# Altium PCB PCB1.PcbDoc
Units mm, origin at the board's own origin, x right, y up, seen from the top; angles counter-clockwise.
Board outline 76.71 x 51.56 mm, 2 copper layers (Top Layer, Bottom Layer); 14 components, 39 nets, 74 pads, 0 vias.
Unrouted connection lines stored in the file: 31.
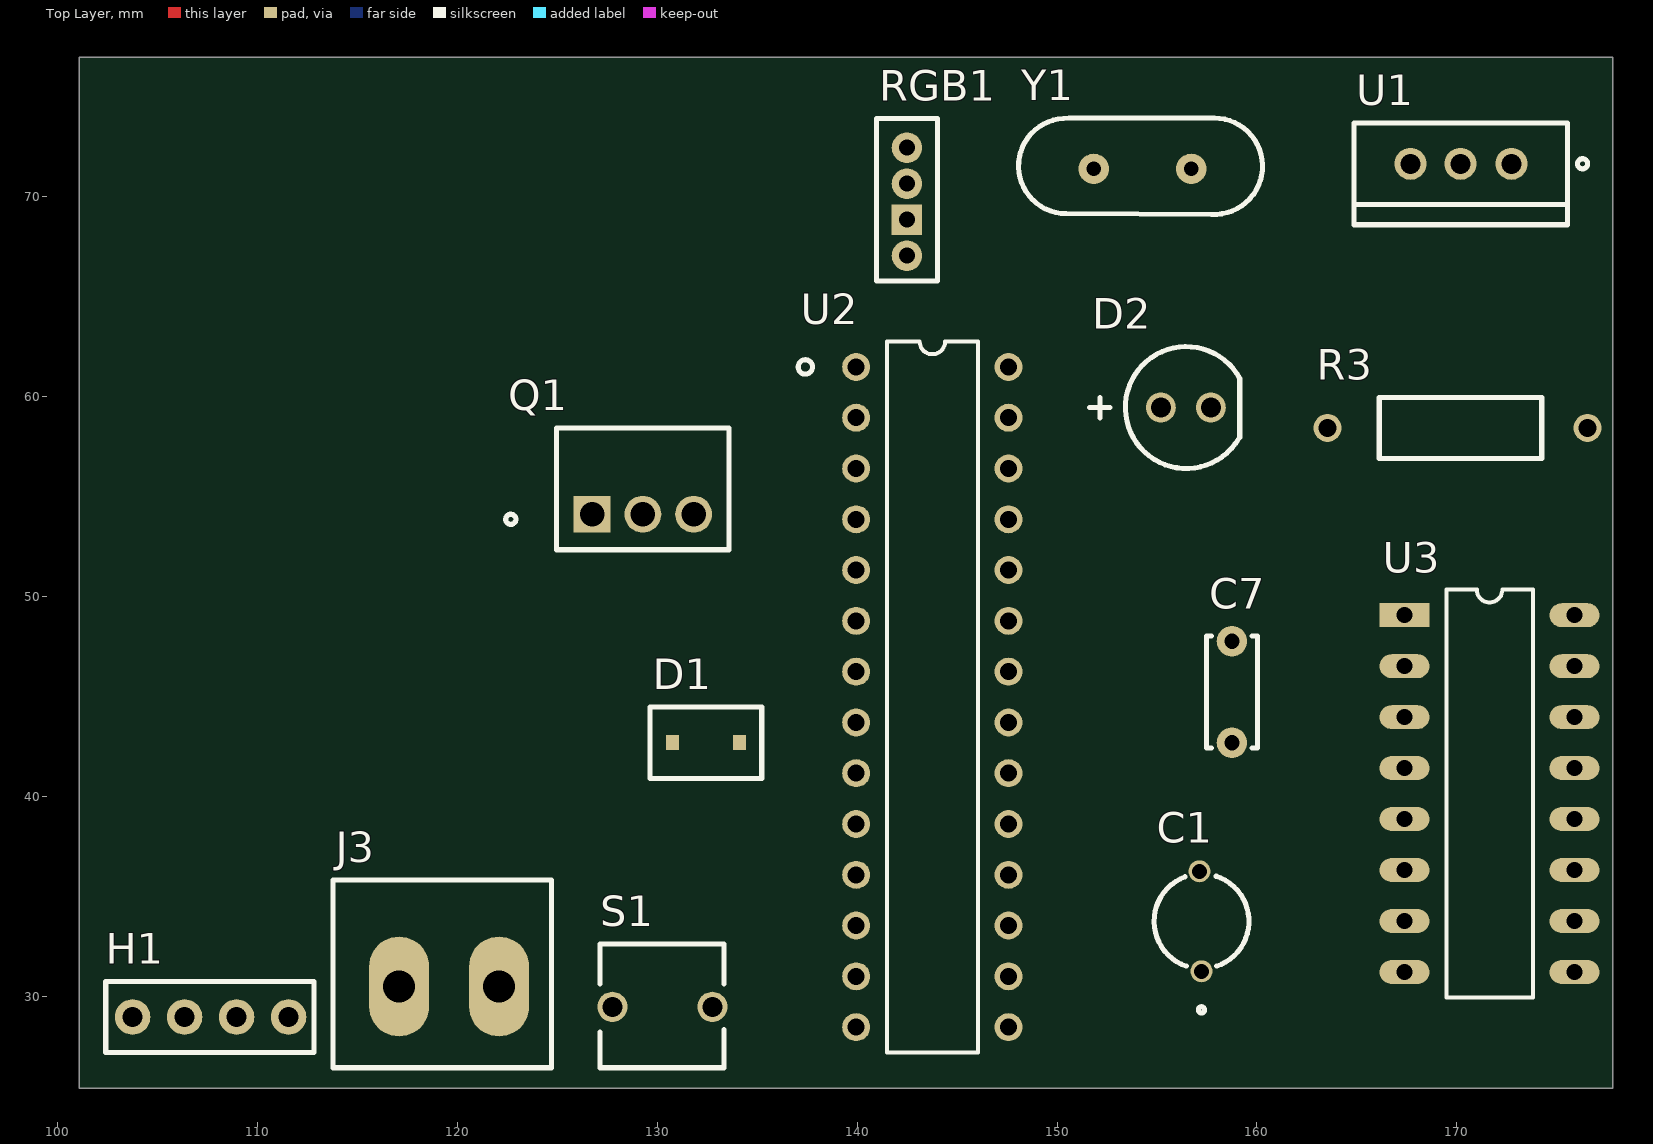
[diagram p0: Top Layer view]
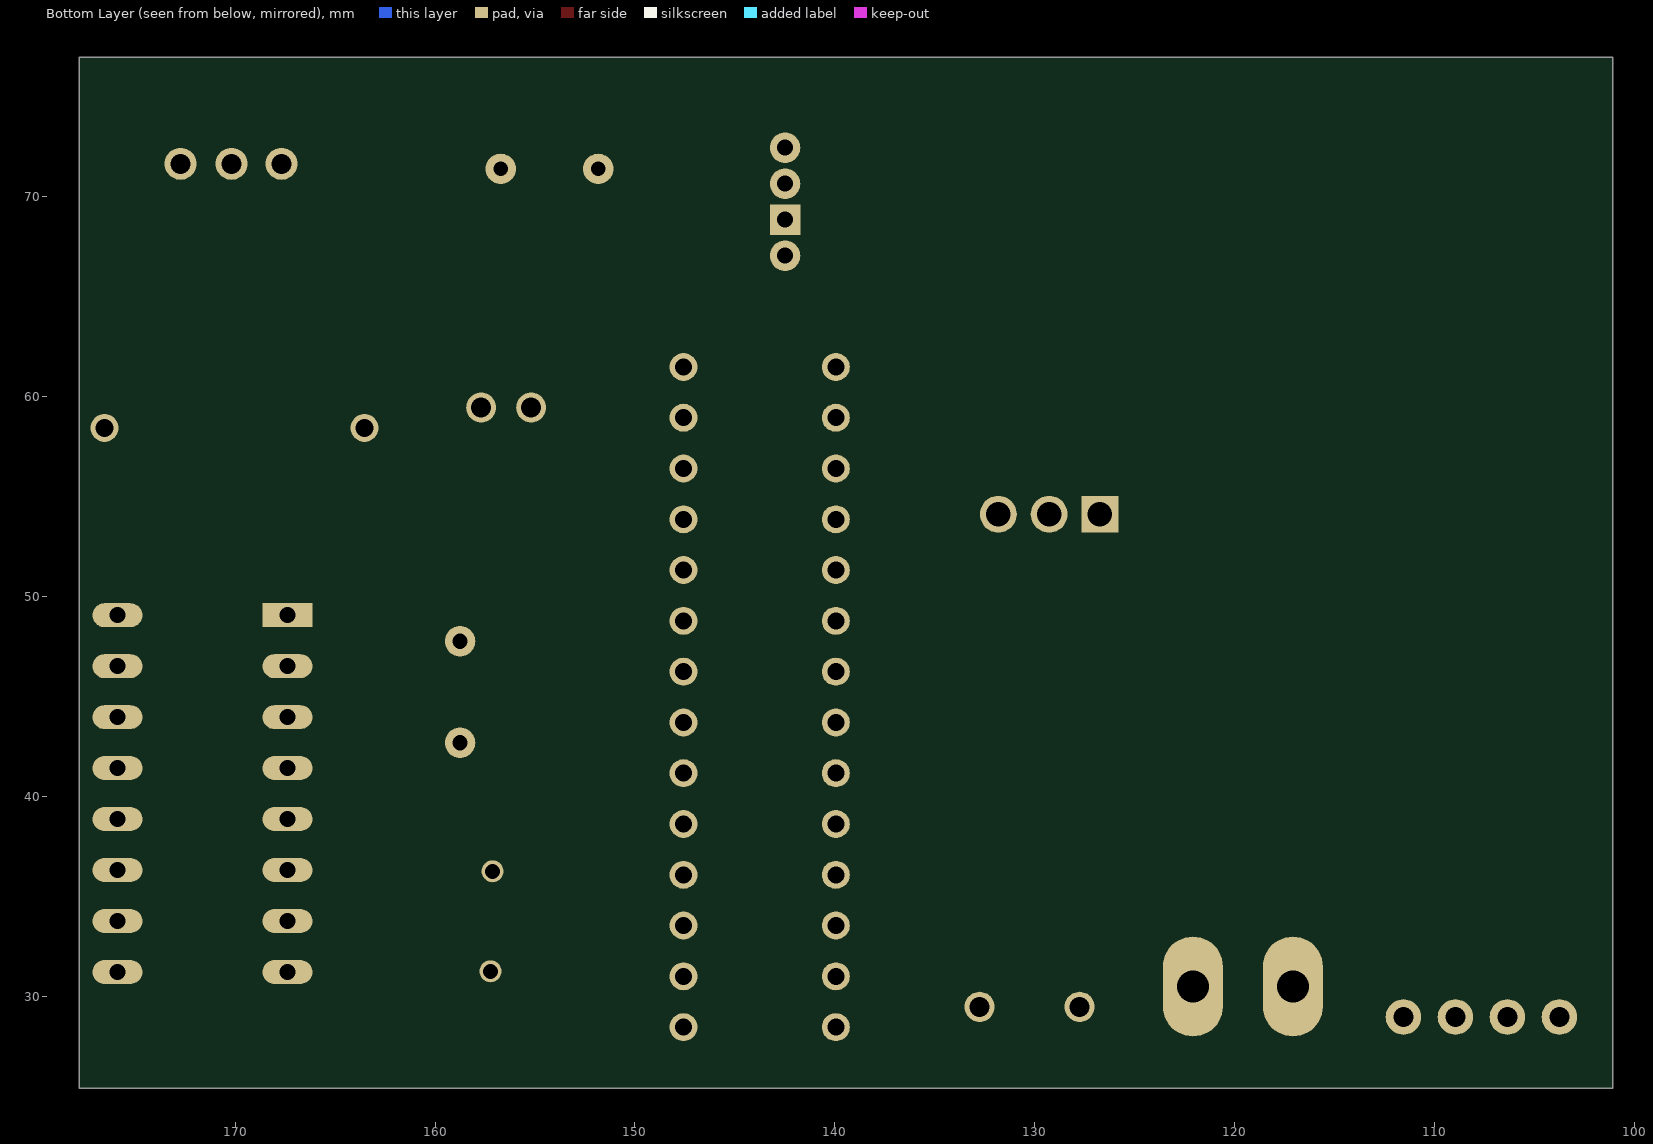
[diagram p1: Bottom Layer view, seen from below]

## Layer stack, top to bottom
Top Solder: solder mask 0.0102, Solder Resist, Dk 3.5
Top Layer: signal copper 0.0356
Dielectric 1: dielectric 0.32, FR-4, Dk 4.8
Bottom Layer: signal copper 0.0356
Bottom Solder: solder mask 0.0102, Solder Resist, Dk 3.5

## Board outline
101.092,25.4 177.8,25.4 177.8,76.962 101.092,76.962

## Design rules (kind name [scope] priority, off if disabled: settings)
Clearance [All] p1: gap=0.254 ignorepadtopadclearanceinfootprint=FALSE
PolygonConnect [All] p1: connectstyle=Relief reliefconductorwidth=0.254 reliefentries=4 polygonreliefangle="90 Angle" airgapwidth=0.254
RoutingVias [All] p1: holewidth=0.711 width=1.27 viastyle="Through Hole" minholewidth=0.711 minwidth=1.27 maxholewidth=0.711 maxwidth=1.27
SolderMaskExpansion [All] p1: expansion=0.102 istentingtop=FALSE
SupplyNets "Schematic Supply Nets_5" [InNet('+4.5V : 36V')] p1: voltage=0.000
SupplyNets "Schematic Supply Nets_4" [InNet('Vin')] p2: voltage=0.000
SupplyNets "Schematic Supply Nets_3" [InNet('+5V')] p3: voltage=0.000
SupplyNets "Schematic Supply Nets_2" [InNet('+5')] p4: voltage=0.000
SupplyNets "Schematic Supply Nets_1" [InNet('VCC')] p5: voltage=0.000
SupplyNets "Schematic Supply Nets" [InNet('GND')] p6: voltage=0.000
Width [All] p1: maxlimit=0.254 minlimit=0.254 preferedwidth=0.254
30 further rules are at their usual default settings.

## Components (designator, comment, footprint, x,y, rotation, side; value= is the part's Value field where it differs from the comment)
C1 "CAP 10uF" "Cap 10uF" 157.226,31.242 r90 top
C7 "CAP 22pF" "Cap 22pF" 158.75,42.672 r90 top
D1 "1N5819 SMD Diode" "1N5819 SMD Diode" 130.762,42.672 r0 top
D2 "LED" LED 155.194,59.436 r0 top
H1 "Headers 4pin_1" "Header 4pin" 111.591,28.956 r180 top
J3 "Terminal Block" "Terminal Block 2pin" 117.856,21.336 r0 top
Q1 "IRF5305 P-MOSFET" IRF5305 126.746,53.975 r0 top
R3 "Res1k" "Res 1K" 176.53,58.42 r180 top
RGB1 "RGB LED" "RGB LED" 142.494,67.034 r90 top
S1 "Push Button" "Push Button" 127.762,29.464 r0 top
U1 "LM7805" LM7805 172.73,71.628 r180 top
U2 "Atmega328p" "ATMega 328 P-PU - duplicate" 139.954,28.448 r0 top
U3 "L293D" L293D 170.18,46.512 r0 top
Y1 "Crystal oscillator" "Crrystal 16MHZ" 156.718,71.374 r180 top

## Footprints (in the part's own frame and the unit in brackets; to place one, negate y for a bottom-side part, rotate by r counter-clockwise, add the part's x,y. Pads: shape width x height; smd on the part's side, far side on the other; paste and mask are expansions set on the pad)
"1N5819 SMD Diode" [mm]
  rect 0.65x0.75 smd: A(0,0) K(3.35,0)
  silkscreen extent -1.12,-1.78 4.47,1.78, body extent -0.15,-0.77 3.5,0.77, height 1.5
"ATMega 328 P-PU - duplicate" [mm]
  round 1.4 hole 0.85: 1(0,33.02) 2(0,30.48) 3(0,27.94) 4(0,25.4) 5(0,22.86) 6(0,20.32) 7(0,17.78) 8(0,15.24) 9(0,12.7) 10(0,10.16) 11(0,7.62) 12(0,5.08) 13(0,2.54) 14(0,0) 15(7.62,0) 16(7.62,2.54) 17(7.62,5.08) 18(7.62,7.62) 19(7.62,10.16) 20(7.62,12.7) 21(7.62,15.24) 22(7.62,17.78) 23(7.62,20.32) 24(7.62,22.86) 25(7.62,25.4) 26(7.62,27.94) 27(7.62,30.48) 28(7.62,33.02)
  silkscreen extent -2.9,-1.27 6.09,34.29, body extent -0.14,-0.83 7.76,33.85, height 4.57
"Cap 10uF" [mm]
  round 1.1 hole 0.75: 1(0,0) 2(5,0.102)
  silkscreen extent -2.08,-2.37 4.75,2.37, body extent -0.21,-2.5 5.29,2.5, height 12.5
"Cap 22pF" [mil]
  round 60 hole 30: 1(0,0) 2(200,0)
  silkscreen extent -10,-50 210,50, body extent -8,-49 208,49, height 217
"Crrystal 16MHZ" [mil]
  round 60 hole 28.74: 1(0,0) 2(192.13,0)
  silkscreen extent -140,-100 340,90, body extent -123,-92 323,92, height 256
"Header 4pin" [mil]
  round 70 hole 39.37: 1(1,0) 2(103.36,0) 3(205.72,0) 4(308.09,0)
  silkscreen extent -49,-70 361,70, body extent -49,-38 371,58, height 335
IRF5305 [mm]
  rect 1.845x1.845 hole 1.23: 1(0,0.127)
  round 1.845 hole 1.23: 2(2.54,0.127) 3(5.08,0.127)
  silkscreen extent -4.32,-1.65 6.86,4.44, body extent -2.67,-1.27 7.75,3.17, height 19.3
L293D [mm]
  rect 2.5x1.2 hole 0.8: 1(-2.794,2.54)
  oval 2.5x1.2 hole 0.8: 2(-2.794,-0.01) 3(-2.794,-2.56) 4(-2.794,-5.11) 5(-2.794,-7.66) 6(-2.794,-10.21) 7(-2.794,-12.76) 8(-2.794,-15.31) 9(5.706,-15.31) 10(5.706,-12.76) 11(5.706,-10.21) 12(5.706,-7.66) 13(5.706,-5.11) 14(5.706,-2.56) 15(5.706,-0.01) 16(5.706,2.54)
  silkscreen extent -0.71,-16.58 3.62,3.81, body extent -3.3,-16.44 5.94,3.56, height 5.1
LED [mm]
  round 1.5 hole 1: 1(0,0) 2(2.5,0)
  silkscreen extent -3.56,-3.05 3.95,3.05, body extent -1.66,-2.95 3.77,2.95, height 10.6
LM7805 [mm]
  round 1.6 hole 1: 1(0,0) 2(2.55,0) 3(5.05,0)
  silkscreen extent -3.81,-2.03 7.87,3.05, body extent -2.54,-1.84 7.62,2.86, height 19.81
"Push Button" [mm]
  round 1.508 hole 1: 1(0,0) 2(5,0)
  silkscreen extent -0.61,-3.05 5.59,3.15
"Res 1K" [mm]
  round 1.4 hole 0.9: 1(0,0) 2(13,0)
  silkscreen extent 2.29,-1.52 10.41,1.52, body extent -0.2,-1.27 13.4,1.23, height 4.04
"RGB LED" [mil]
  round 60 hole 31.5: 1(0,0) 3(141.73,0) 4(212.6,0)
  rect 60x60 hole 31.5: 2(70.87,0)
  silkscreen extent -50,-60 270,60
"Terminal Block 2pin" [mm]
  oval 3x5 hole 1.6: 1(-0.762,9.144) 2(4.238,9.144)
  silkscreen extent -4.06,5.08 6.86,14.48, body extent -3.9,5.22 6.7,14.22, height 12.6

## Nets (pads, with @x,y where several pads share a name; then routed paths per layer and width w, separated by ;. In a path a pad name is that pad's centre, name@x,y a point inside that pad or via, vN(x,y) a via of type N, cw(c..) or ccw(c..) an arc to the next point about the centre after c; other vN are vias at no path point)
"+4.5V : 36V": U3.8
+5: U3.16
+5V: C1.1 H1.1 U1.2 U2.7 U2.20
BLUE: U2.14
ECHO1: H1.3 U2.11
ECHO2: U2.25
EN: U2.5 U3.1 U3.9
GND: C1.2 C7.1 D2.2 H1.4 S1.2 U1.3 U2.8 U2.22 U3.4 U3.5 U3.12 U3.13
GREEN: U2.13
IN1: U2.26 U3.2
IN2: U2.15 U3.7
IN3: U2.4 U3.10
IN4: U2.6 U3.15
LED_ind: R3.2 U2.23
MISO: U2.18
MOSI: U2.17
NetC5_2: U2.9 Y1.2
NetC6_2: U2.21
NetC7_2: C7.2 U2.10 Y1.1
NetD1_1: 
NetD2_1: D2.1 R3.1
NetR4_1: 
NetR5_1: 
NetR6_1: 
OUT1: U3.3
OUT2: U3.6
OUT3: J3.2 U3.11
OUT4: J3.1 U3.14
RED: U2.24
Reset: S1.1 U2.1
RX: U2.2
SCK: U2.19
SCL: U2.28
SDA: U2.27
TRIG1: H1.2 U2.12
TRIG2: U2.16
TX: U2.3
VCC: U1.1
Vin: 
pads on no net: D1.A D1.K Q1.1 Q1.2 Q1.3 RGB1.1 RGB1.2 RGB1.3 RGB1.4